# Altium PCB PCB2.PcbDoc
Units mm, origin at the board's own origin, x right, y up, seen from the top; angles counter-clockwise.
Board outline 59.87 x 53.51 mm, 2 copper layers (Top Layer, Bottom Layer); 24 components, 23 nets, 69 pads, 0 vias.
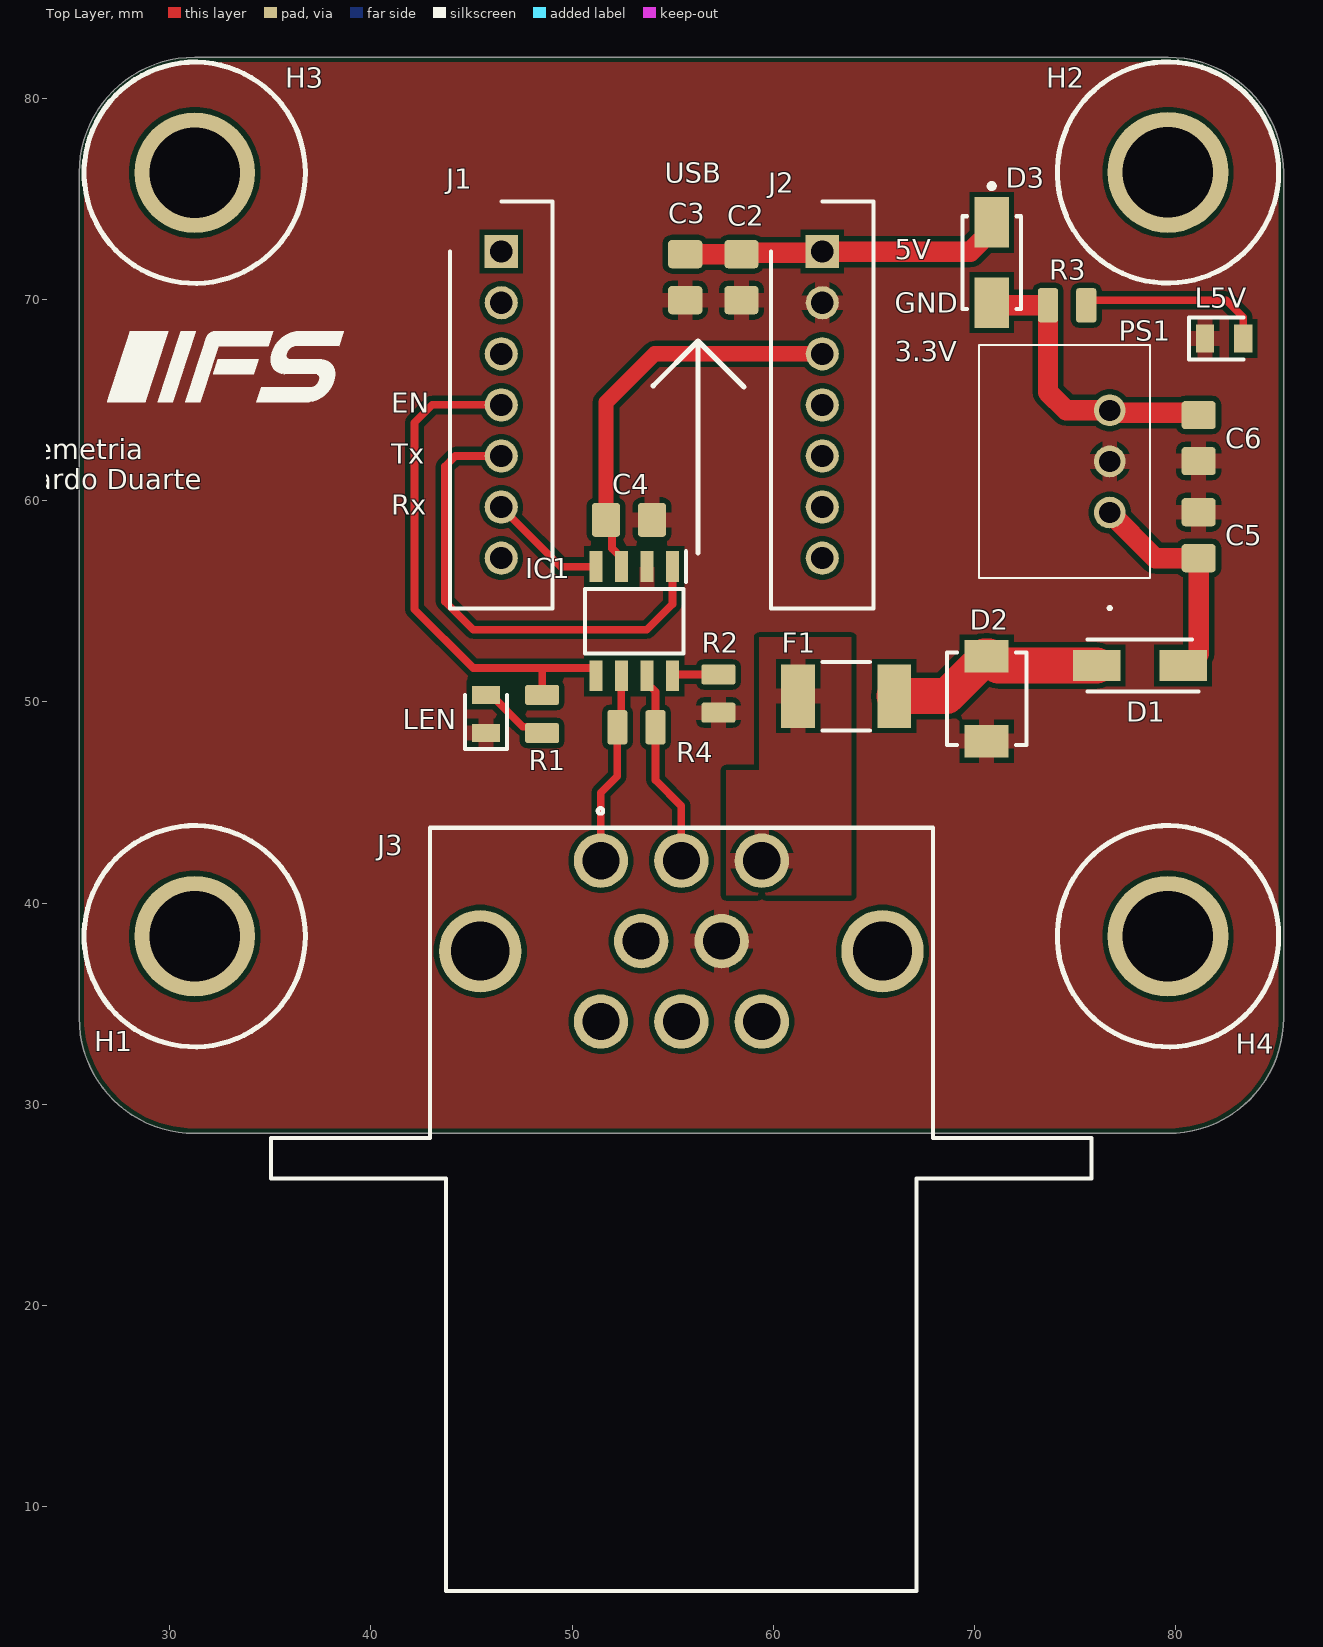
[diagram p0: Top Layer view]
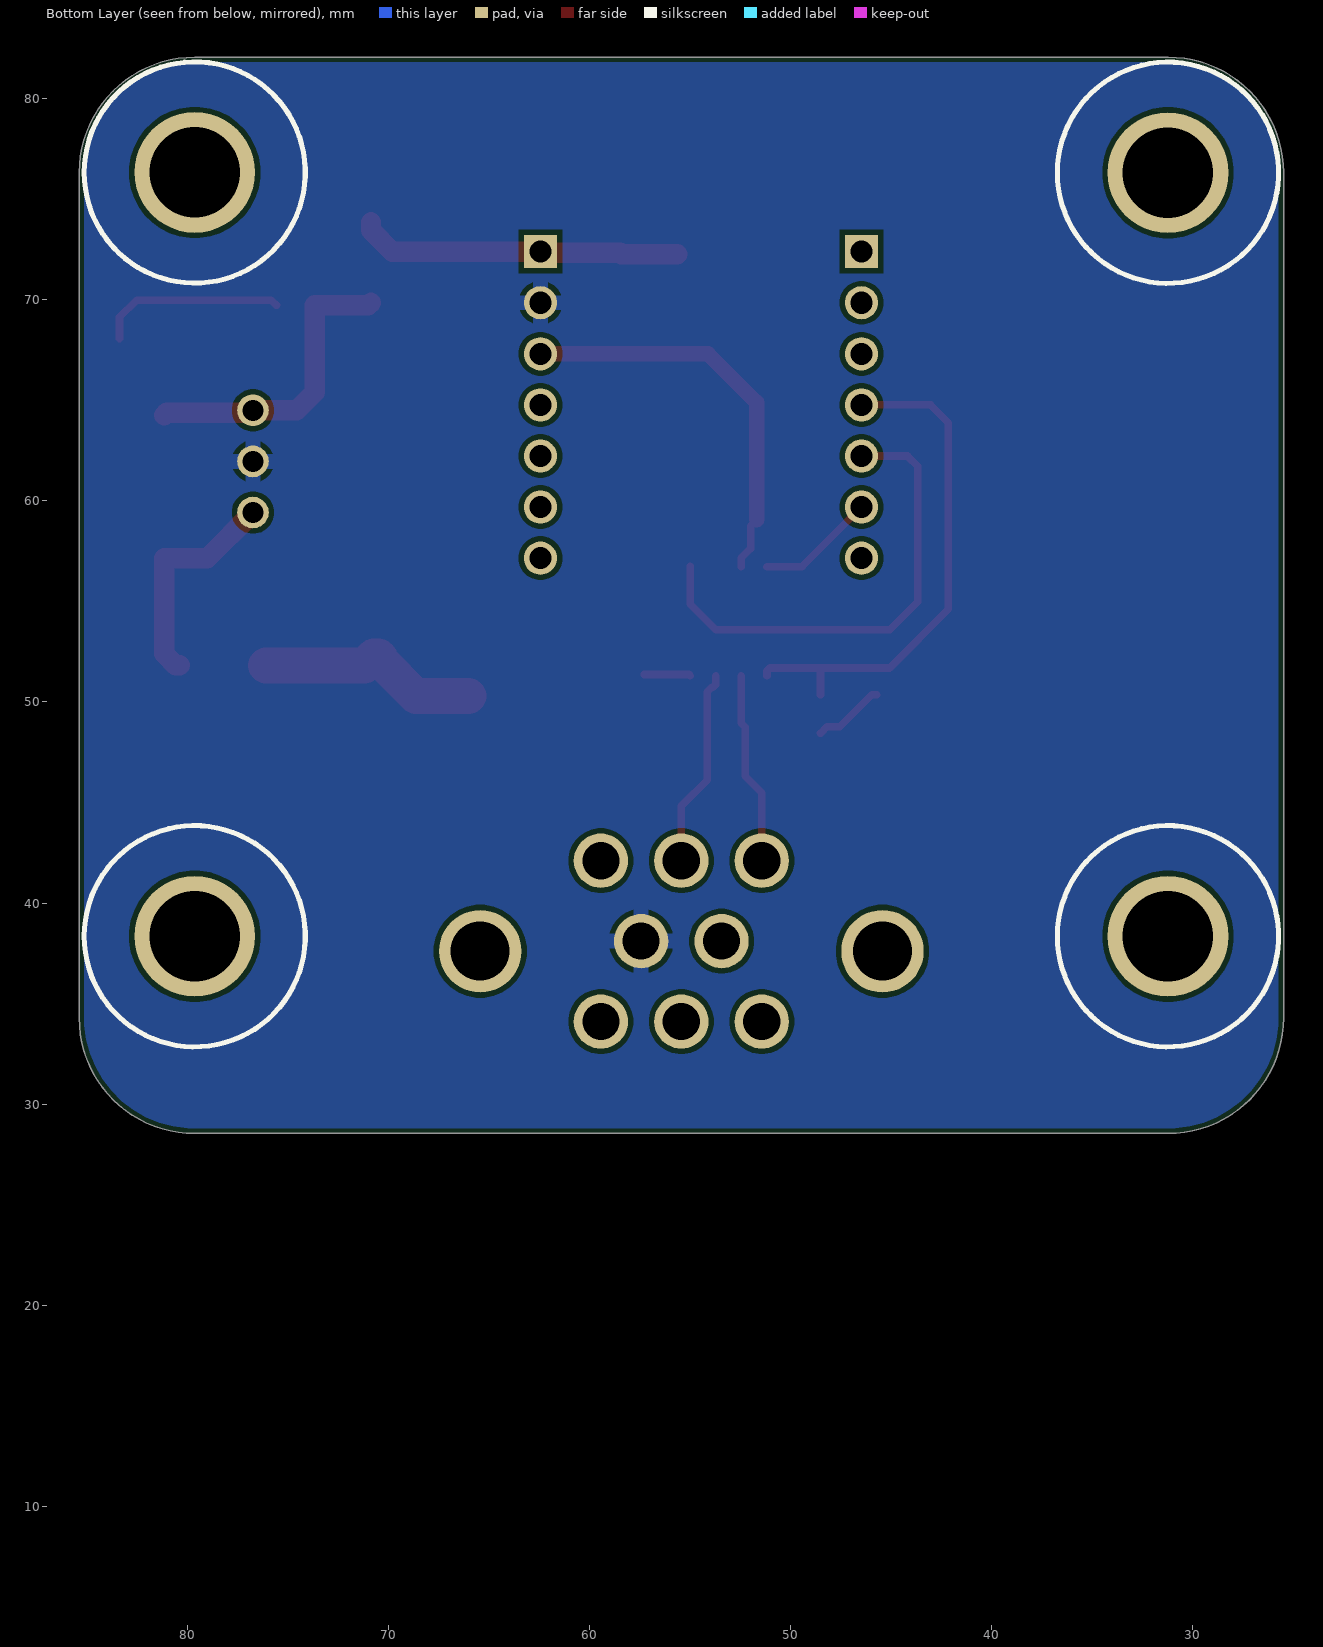
[diagram p1: Bottom Layer view, seen from below]
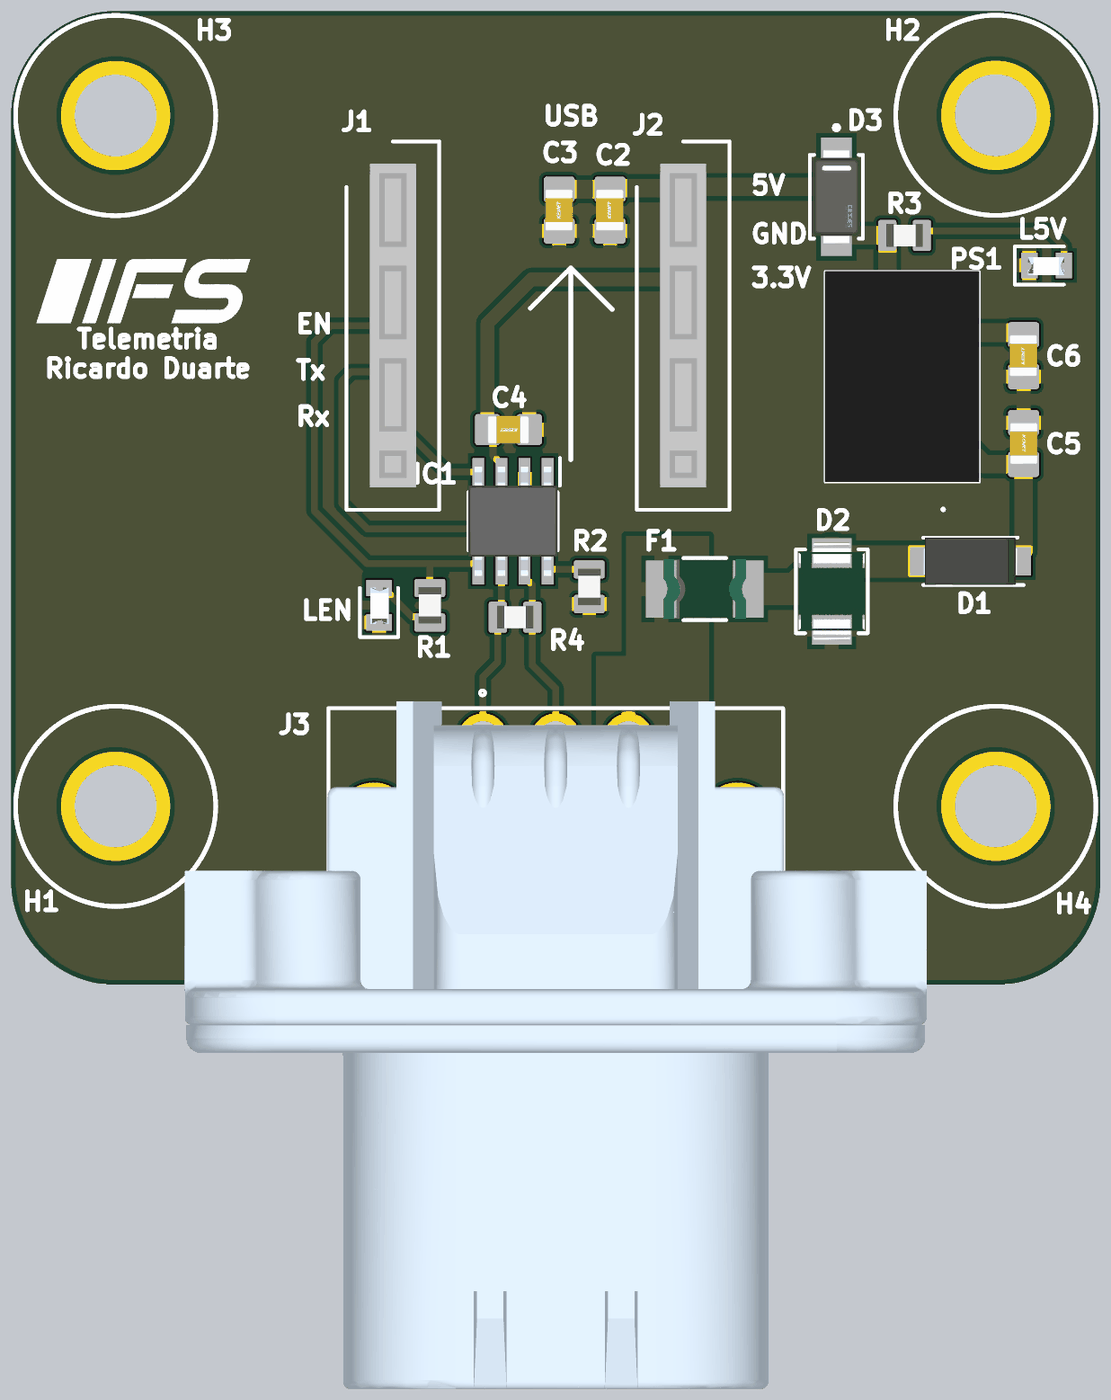
[diagram p2: 3D render of the assembled board from above, using the file's embedded part models]

## Layer stack, top to bottom
Top Solder: solder mask 0.0102, Solder Resist, Dk 3.5
Top Layer: signal copper 0.0356
Dielectric 1: dielectric 0.32, FR-4, Dk 4.8
Bottom Layer: signal copper 0.0356
Bottom Solder: solder mask 0.0102, Solder Resist, Dk 3.5

## Board outline
25.499,34.29 25.499,76.313 cw(c31.242,76.313) 31.242,82.056 79.629,82.056 cw(c79.629,76.313) 85.372,76.313 85.372,34.29 cw(c79.629,34.29) 79.629,28.547 31.242,28.547 cw(c31.242,34.29)

## Design rules (kind name [scope] priority, off if disabled: settings)
BoardOutlineClearance [All] p1: gap=0.254 ignorepadtopadclearanceinfootprint=FALSE except(0: Arc-SplitContinuation Track-SplitContinuation SMDPad-SplitContinuation THPad-SplitContinuation Via-SplitContinuation Fill-SplitContinuation Poly-SplitContinuation Region-SplitContinuation Text-SplitContinuation)
Clearance [All] p1: gap=0.254 ignorepadtopadclearanceinfootprint=FALSE
Height [All] p1 off: minheight=0 maxheight=25.4 prefheight=12.7
PlaneConnect [All] p1: planeconnectstyle=Relief reliefexpansion=0.508 reliefentries=4 reliefconductorwidth=0.762 reliefairgap=0.254
PolygonConnect [All] p1: connectstyle=Relief reliefconductorwidth=0.762 reliefentries=4 polygonreliefangle="90 Angle" airgapwidth=0.254
RoutingVias [All] p1: holewidth=0.711 width=1.27 viastyle="Through Hole" minholewidth=0.711 minwidth=1.27 maxholewidth=0.711 maxwidth=1.27
SolderMaskExpansion [All] p1: expansion=0.102 istentingtop=FALSE
Width [All] p1: maxlimit=2.54 minlimit=0.254 preferedwidth=0.254 minimp=50.000000 maximp=50.000000 favimp=50.000000
28 further rules are at their usual default settings.

## Classes and differential pairs
component class Power: C5 C6 D1 D2 F1 L5V PS1 R3
component class Main: C2 C3 C4 D3 H1 H2 H3 H4 IC1 J2 J3 LEN q R1 R2 R4

## Components (designator, comment, footprint, x,y, rotation, side; value= is the part's Value field where it differs from the comment)
C2 "100nF" CAP_0805 58.42,71.12 r90 top
C3 "10uF" CAP_0805 55.626,71.12 r90 top value=10µF
C4 "100nF" CAP_0805 52.832,59.055 r180 top
C5 "10uF" CAP_0805 81.153,58.293 r270 top value=10µF
C6 "10uF" CAP_0805 81.153,63.119 r90 top value=10µF
D1 "B360A-13-F" DIOM5226X240N 78.232,51.816 r180 top
D2 "SMBJ15CA-TR" FP-SMB-CA-MFG 70.612,50.165 r270 top
D3 "B360A-13-F" FP-SMA-MFG 70.866,71.85 r270 top
F1 "MINISMDC050F-2" MINISMDC050F-2-Footprint-1 63.627,50.292 r0 top
H1 "M4 Mounting Hole" "M4 Screw Hole-Footprint-1" 31.242,38.354 r0 top
H2 "M4 Mounting Hole" "M4 Screw Hole-Footprint-1" 79.629,76.327 r0 top
H3 "M4 Mounting Hole" "M4 Screw Hole-Footprint-1" 31.242,76.313 r0 top
H4 "M4 Mounting Hole" "M4 Screw Hole-Footprint-1" 79.629,38.354 r0 top
IC1 "SN65HVD234DR" SOIC127P600X175-8N 53.086,54.02 r270 top
J1 "90147-1107" SHDR7W65P0X254_1X7_2024X510X1180P 46.482,72.39 r270 top
J2 "90147-1107" SHDR7W65P0X254_1X7_2024X510X1180P 62.442,72.39 r270 top
J3 "776280-1" 776280-1 55.436,26.312 r0 top
L5V "150080VS75000" LEDC2012X80N 82.423,68.072 r0 top
LEN "150080VS75000" LEDC2012X80N 45.72,49.403 r90 top
PS1 "R-78E5.0-1.0" R78E5010 76.734,59.419 r90 top
R1 "4K7" RES_0805 48.514,49.403 r270 top value=1.5k
R2 "4K7" RES_0805 57.277,50.419 r270 top value=100k
R3 "4K7" RES_0805 74.615,69.723 r180 top value=3k
R4 "4K7" RES_0805 53.202,48.745 r180 top value=120

## Footprints (in the part's own frame and the unit in brackets; to place one, negate y for a bottom-side part, rotate by r counter-clockwise, add the part's x,y. Pads: shape width x height; smd on the part's side, far side on the other; paste and mask are expansions set on the pad)
776280-1 [mm]
  round 2.7 hole 1.85: 1(-4,15.8) 2(0,15.8) 3(4,15.8) 4(-2,11.8) 5(2,11.8) 6(-4,7.8) 7(0,7.8) 8(4,7.8)
  round 4.1 hole 2.93: 9(-10,11.3) 10(10,11.3)
  silkscreen extent -20.4,-20.5 20.4,18.41, body extent -20.4,-20 20.4,17.8, height 32.12
CAP_0805 [mm]
  rrect25% 1.4x1.7 smd: 1(-1.143,0) 2(1.143,0)
  body extent -1.15,-0.76 1.15,0.79, height 1.01
DIOM5226X240N [mm]
  rect 2.35x1.55 smd: 1(-2.15,0) 2(2.15,0)
  silkscreen extent -2.93,-1.3 2.6,1.3, body extent -2.6,-1.3 2.6,1.3, height 2.4
FP-SMA-MFG [mm]
  rect 2.5x1.7 smd paste+0 mask+0: 1(-2,0) 2(2,0)
  silkscreen extent -3.92,-1.46 2.3,1.46, body extent -3.35,-1.56 3.35,1.56, height 0.25
FP-SMB-CA-MFG [mm]
  rect 1.62x2.18 smd paste+0 mask+0: 1(-2.11,0) 2(2.11,0)
  silkscreen extent -2.3,-1.97 2.3,1.97, body extent -3.02,-2.07 3.02,2.07, height 0.25
LEDC2012X80N [mm]
  rect 0.9x1.4 smd: 1(-0.95,0) 2(0.95,0)
  silkscreen extent -1.75,-1.05 0.95,1.05, body extent -1.03,-0.53 0.97,0.47, height 0.82
"M4 Screw Hole-Footprint-1" [mm]
  round 6 hole 4.5 mask+0: 1(0,0)
  silkscreen extent -5.5,-5.5 5.5,5.5
MINISMDC050F-2-Footprint-1 [mm]
  rect 1.68x3.15 smd paste+0 mask+0: 1(-2.39,0) 2(2.39,0)
  silkscreen extent -1.17,-1.71 1.17,1.71, body extent -3.33,-1.81 3.33,1.81, height 0.25
R78E5010 [mm]
  round 1.575 hole 1.05: 1(0,0) 2(2.54,0) 3(5.08,0)
  silkscreen extent -4.8,-2 8.34,6.5, body extent -3.25,-2 8.35,6.5, height 10.85
RES_0805 [mm]
  rrect25% 1x1.7 smd: 1(-0.95,0) 2(0.95,0)
  body extent -1,-0.63 1,0.63, height 0.47
SHDR7W65P0X254_1X7_2024X510X1180P [mm]
  rect 1.65x1.65 hole 1.1: 1(0,0)
  round 1.65 hole 1.1: 2(2.54,0) 3(5.08,0) 4(7.62,0) 5(10.16,0) 6(12.7,0) 7(15.24,0)
  silkscreen extent -2.5,-2.55 17.74,2.55, body extent -1.27,-1.27 16.51,1.27, height 8.1
SOIC127P600X175-8N [mm]
  rect 1.525x0.65 smd: 1(-2.712,1.905) 2(-2.712,0.635) 3(-2.712,-0.635) 4(-2.712,-1.905) 5(2.712,-1.905) 6(2.712,-0.635) 7(2.712,0.635) 8(2.712,1.905)
  silkscreen extent -3.47,-2.45 1.6,2.58, body extent -3,-2.45 3,2.45, height 1.75

## Part data
C2 C4: library part CMP-001-00010-2, "Ceramic Capacitor, Multilayer, Ceramic, 50V, 20% +Tol, 20% -Tol, X7R, 15% TC, 0.1uF, Surface Mount, 0805", Capacitor Type=Ceramic, Case/Package=0805, Max Operating Temperature=125°C, Min Operating Temperature=-55°C, Rated DC Voltage (URdc)=50V, Temperature Characteristics Code=X7R, Design Item ID=CAP_0805, Length=2mm, Mounting Technology="Surface Mount", Reference Standard=AEC-Q200, RoHS Compliant=Yes, Source=Schematic-Lib-PhilsLab.SchLib, Width=1.25mm
C3 C5 C6: library part CMP-001-00011-2, "Ceramic Capacitor, Multilayer, Ceramic, 25V, 10% +Tol, 10% -Tol, X5R, 15% TC, 10uF, Surface Mount, 0805", Capacitor Type=Ceramic, Case/Package=0805, Max Operating Temperature=85°C, Min Operating Temperature=-55°C, Rated DC Voltage (URdc)=25V, Design Item ID=CAP_0805, Mounting Technology="Surface Mount", Reference Standard=AEC-Q200, RoHS Compliant=Yes, Source=Schematic-Lib-PhilsLab.SchLib
D1: library part CMP-039-000000-1, "Diode", Manufacturer_Name="Diodes Inc.", Mouser Part Number=621-B360A-F, Arrow Part Number=B360A-13-F, Arrow Price/Stock=https://www.arrow.com/en/products/b360a-13-f/diodes-incorporated?region=asia, Datasheet Link=https://www.diodes.com/assets/Datasheets/ds30891.pdf, Design Item ID=B360A-13-F, Height=2.4mm, Manufacturer_Part_Number=B360A-13-F, Mouser Price/Stock=https://www.mouser.co.uk/ProductDetail/Diodes-Incorporated/B360A-13-F?qs=sVoUGXYOGv3xoCWNHVb4bA%3D%3D, Source=SamacSys.SchLib
D2: library part CMP-004-00000-1, "Trans Voltage Suppressor Diode, 4000W, 15V V(RWM), Bidirectional, 1 Element, Silicon, DO-214AA", Max Operating Temperature=150°C, Min Operating Temperature=-55°C, Pins=2, RoHS Compliant=Yes
D3: library part CMP-039-000000-2, "Rectifier Diode, Schottky, 1 Phase, 1 Element, 3A, 60V V(RRM), Silicon", Forward Voltage=700mV, Manufacturer_Name="Diodes Inc.", Max Operating Temperature=125°C, Max Output current=3A, Min Operating Temperature=-55°C, Mouser Part Number=621-B360A-F, Arrow Part Number=B360A-13-F, Arrow Price/Stock=https://www.arrow.com/en/products/b360a-13-f/diodes-incorporated?region=asia, Datasheet Link=https://www.diodes.com/assets/Datasheets/ds30891.pdf, Design Item ID=B360A-13-F, Diode Element Material=SILICON, Diode Type=RECTIFIER, Height=2.4mm, Manufacturer_Part_Number=B360A-13-F, Mouser Price/Stock=https://www.mouser.co.uk/ProductDetail/Diodes-Incorporated/B360A-13-F?qs=sVoUGXYOGv3xoCWNHVb4bA%3D%3D, Pins=2, RoHS Compliant=Yes, Source=SamacSys.SchLib, Technology=SCHOTTKY, Terminal Finish=Tin, Terminal Form="C BEND", Terminal Position=DUAL
F1: library part CMP-005-00000-2, "PTC Resettable Fuse, 24V, Surface Mount", Current Rating=500mA
H1 H2 H3 H4: library part CMP-00028-00000-4, "IFS Standard M4 hole for mounting PCBs"
IC1: "Integrated Circuit", Manufacturer_Name="Texas Instruments", Mouser Part Number=595-SN65HVD234DR, Arrow Part Number=SN65HVD234DR, Arrow Price/Stock=https://www.arrow.com/en/products/sn65hvd234dr/texas-instruments?region=nac, Datasheet Link=http://www.ti.com/lit/gpn/sn65hvd234, Height=1.75mm, Manufacturer_Part_Number=SN65HVD234DR, Mouser Price/Stock=https://www.mouser.co.uk/ProductDetail/Texas-Instruments/SN65HVD234DR?qs=QViXGNcIEAtzI7GJEWw0wA%3D%3D
J1 J2: "Connector", Manufacturer_Name=Molex, Mouser Part Number=538-90147-1107, Datasheet Link=https://componentsearchengine.com/Datasheets/2/90147-1107.pdf, Height=11.8mm, Manufacturer_Part_Number=90147-1107, Mouser Price/Stock=https://www.mouser.co.uk/ProductDetail/Molex/90147-1107?qs=QESXi79X%252BKpbYN2OdNw17A%3D%3D
J3: library part CMP-002-00012-1, "Connector", Manufacturer_Name="TE Connectivity", Mouser Part Number=571-776280-1, Arrow Part Number=776280-1, Arrow Price/Stock=https://www.arrow.com/en/products/776280-1/te-connectivity, Datasheet Link=https://www.te.com/commerce/DocumentDelivery/DDEController?Action=srchrtrv&DocNm=1-1773979-2&DocType=Data%20Sheet&DocLang=English&PartCntxt=776280-1&DocFormat=pdf, Design Item ID=776280-1, Manufacturer_Part_Number=776280-1, Mouser Price/Stock=https://www.mouser.co.uk/ProductDetail/TE-Connectivity/776280-1?qs=tLAa1RwIH6coumJMxuaTDA%3D%3D, Source=SamacSys.SchLib
L5V LEN: library part CMP-018-000003-2, "Single Color LED, Bright Green, Water Clear, 1.4mm", Color=Green, Forward Current=30mA, Manufacturer_Name="Wurth Elektronik", Max Operating Temperature=85°C, Min Operating Temperature=-40°C, Mouser Part Number=710-150080VS75000, Datasheet Link=http://katalog.we-online.com/led/datasheet/150080VS75000.pdf, Design Item ID=150080VS75000, Height=0.8mm, Luminous Intensity-Nom=40mcd, Manufacturer_Part_Number=150080VS75000, Mounting Technology="Surface Mount", Mouser Price/Stock=https://www.mouser.co.uk/ProductDetail/Wurth-Elektronik/150080VS75000?qs=LlUlMxKIyB0tGHJmO6%252B0ug%3D%3D, Pins=2, RoHS Compliant=Yes, Size=1.4mm, Source=SamacSys.SchLib, Viewing Angle=140°
PS1: "Power Supply", Manufacturer_Name="RECOM Power", Mouser Part Number=919-R-78E5.0-1.0, Arrow Part Number=R-78E5.0-1.0, Arrow Price/Stock=https://www.arrow.com/en/products/r-78e5.0-1.0/recom-power?utm_currency=USD&region=europe, Datasheet Link=http://www.recom-power.com/pdf/Innoline/R-78Exx-1.0.pdf, Height=10.4mm, Manufacturer_Part_Number=R-78E5.0-1.0, Mouser Price/Stock=https://www.mouser.co.uk/ProductDetail/RECOM-Power/R-78E5.0-1.0?qs=T0XSgvH75d4EsZCU9I5HVA%3D%3D
R1 R2 R3 R4: library part CMP-009-00012-1, "Resistor SMD 0805 4,7K", Design Item ID=RES_0805, Source=Schematic-Lib-PhilsLab.SchLib

## Nets (pads, with @x,y where several pads share a name; then routed paths per layer and width w, separated by ;. In a path a pad name is that pad's centre, name@x,y a point inside that pad or via, vN(x,y) a via of type N, cw(c..) or ccw(c..) an arc to the next point about the centre after c; other vN are vias at no path point)
3.3V_ESP: C4.2 IC1.3 J2.3 | length 20.2
  Top Layer w0.381: C4.2 51.987,58.757 51.987,57.633 52.451,57.17 IC1.3
  Top Layer w0.762: C4.2 51.689,64.897 54.102,67.31 J2.3
5V_ESP: C2.2 C3.2 D3.1 J2.1 | length 16.1
  Top Layer w1.016: C3.2 C2.2 58.483,72.326 62.379,72.326 J2.1 69.806,72.39 70.866,73.45 D3.1
+5V: C6.2 D3.2 PS1.3 R3.2 | length 15.1
  Top Layer w1.016: D3.2 70.993,69.723 R3.2 73.665,65.4 74.566,64.499 PS1.3 76.852,64.381 81.034,64.381 C6.2
+12F: C5.2 D1.1 PS1.1 | length 11.1
  Top Layer w1.016: PS1.1 79.003,57.15 C5.2 81.153,52.4 80.569,51.816 D1.1
+12V: F1.1 J3.3
CANH: IC1.7 J3.2 R4.1 | length 9.9
  Top Layer w0.381: IC1.7 53.721,50.871 53.856,50.736 53.929,50.736 54.152,50.513 54.152,46.114 55.436,44.83 J3.2
CANL: IC1.6 J3.1 R4.2 | length 9.6
  Top Layer w0.381: J3.1 51.436,45.492 52.252,46.308 R4.2 52.451,48.944 IC1.6
GND: C2.1 C3.1 C4.1 C5.1 C6.1 D2.2 IC1.2 J2.2 J3.5 L5V.1 LEN.1 PS1.2 R2.2
GPIO1: J1.1
GPIO2: J1.2
GPIO3: J1.3
GPIO4: IC1.5 J1.4 R1.1 | length 25.8
  Top Layer w0.381: J1.4 43.053,64.77 42.164,63.881 42.164,54.61 45.085,51.689 48.514,51.689 ; R1.1 48.514,51.689 ; IC1.5 51.181,51.554 51.046,51.689 48.514,51.689
"GPIO5 / Tx": IC1.1 J1.5 | length 24
  Top Layer w0.381: J1.5 44.196,62.23 43.688,61.722 43.688,54.991 45.085,53.594 53.721,53.594 54.991,54.864 IC1.1
"GPIO6 / Rx": IC1.4 J1.6 | length 5.9
  Top Layer w0.381: J1.6 49.44,56.732 IC1.4
GPIO7: J2.6
GPIO8: J2.5
GPIO9: J2.4
GPIO43: J1.7
GPIO44: J2.7
NetD1_2: D1.2 D2.1 F1.2 | length 11.1
  Top Layer w1.778: F1.2 68.629,50.292 70.411,52.074 70.411,52.196 70.49,52.275 D2.1 70.734,52.275 71.193,51.816 D1.2
NetIC1_8: IC1.8 R2.1 | length 2.3
  Top Layer w0.381: IC1.8 55.052,51.369 R2.1
NetL5V_2: L5V.2 R3.1 | length 9.3
  Top Layer w0.381: R3.1 75.819,69.977 82.518,69.977 83.373,69.122 L5V.2
NetLEN_2: LEN.2 R1.2 | length 3.6
  Top Layer w0.381: LEN.2 45.97,50.353 47.56,48.763 48.204,48.763 R1.2
pads on no net: H1.1 H2.1 H3.1 H4.1 J3.4 J3.6 J3.7 J3.8 J3.9 J3.10

## Polygon pours and split planes (outlines as drawn)
GND on Top Layer "GND_L01_P007" (solid, pour order 7): 12.446,107.95 7.493,102.997 7.493,19.812 104.521,19.812 105.029,19.304 105.029,103.759
+12V on Top Layer "+12V_L01_P000" (solid, pour order 0): 57.658,40.386 63.881,40.386 63.881,53.213 59.309,53.213 59.309,46.609 57.658,46.609
GND on Bottom Layer "GND_L02_P008" (solid, pour order 8): 21.082,107.95 21.082,23.876 16.891,19.685 107.569,19.685 107.569,99.949 101.981,105.537

## Silkscreen, mask and mechanical layers (free items; w line width, h text height)
Top Overlay:
  drawing of 8 lines, arcs and shapes, not listed
  text "USB" at 54.61,75.819 h1
  text "5V" at 66.04,72.009 h1
  text "GND" at 66.04,69.342 h1
  text "3.3V" at 66.04,66.929 h1
  text "EN" at 41.021,64.389 h1
  text "Tx" at 41.021,61.849 h1
  text "Telemetria / Ricardo Duarte" at 21.227,60.579 h1
  text "Rx" at 41.021,59.309 h1
Mechanical 1:
  the board outline again, w0.254